# Altium PCB SPINNER_TWIN_STARS.PcbDoc (part 2 of 3)
Units mm, origin at the board's own origin, x right, y up, seen from the top; angles counter-clockwise.
Board outline 105 x 72 mm, 4 copper layers (Top_Elec, Mid Top Layer, Mid Bottom Layer, Bottom_GND), stack 0.742 mm thick; 199 components, 124 nets, 594 pads, 799 vias.
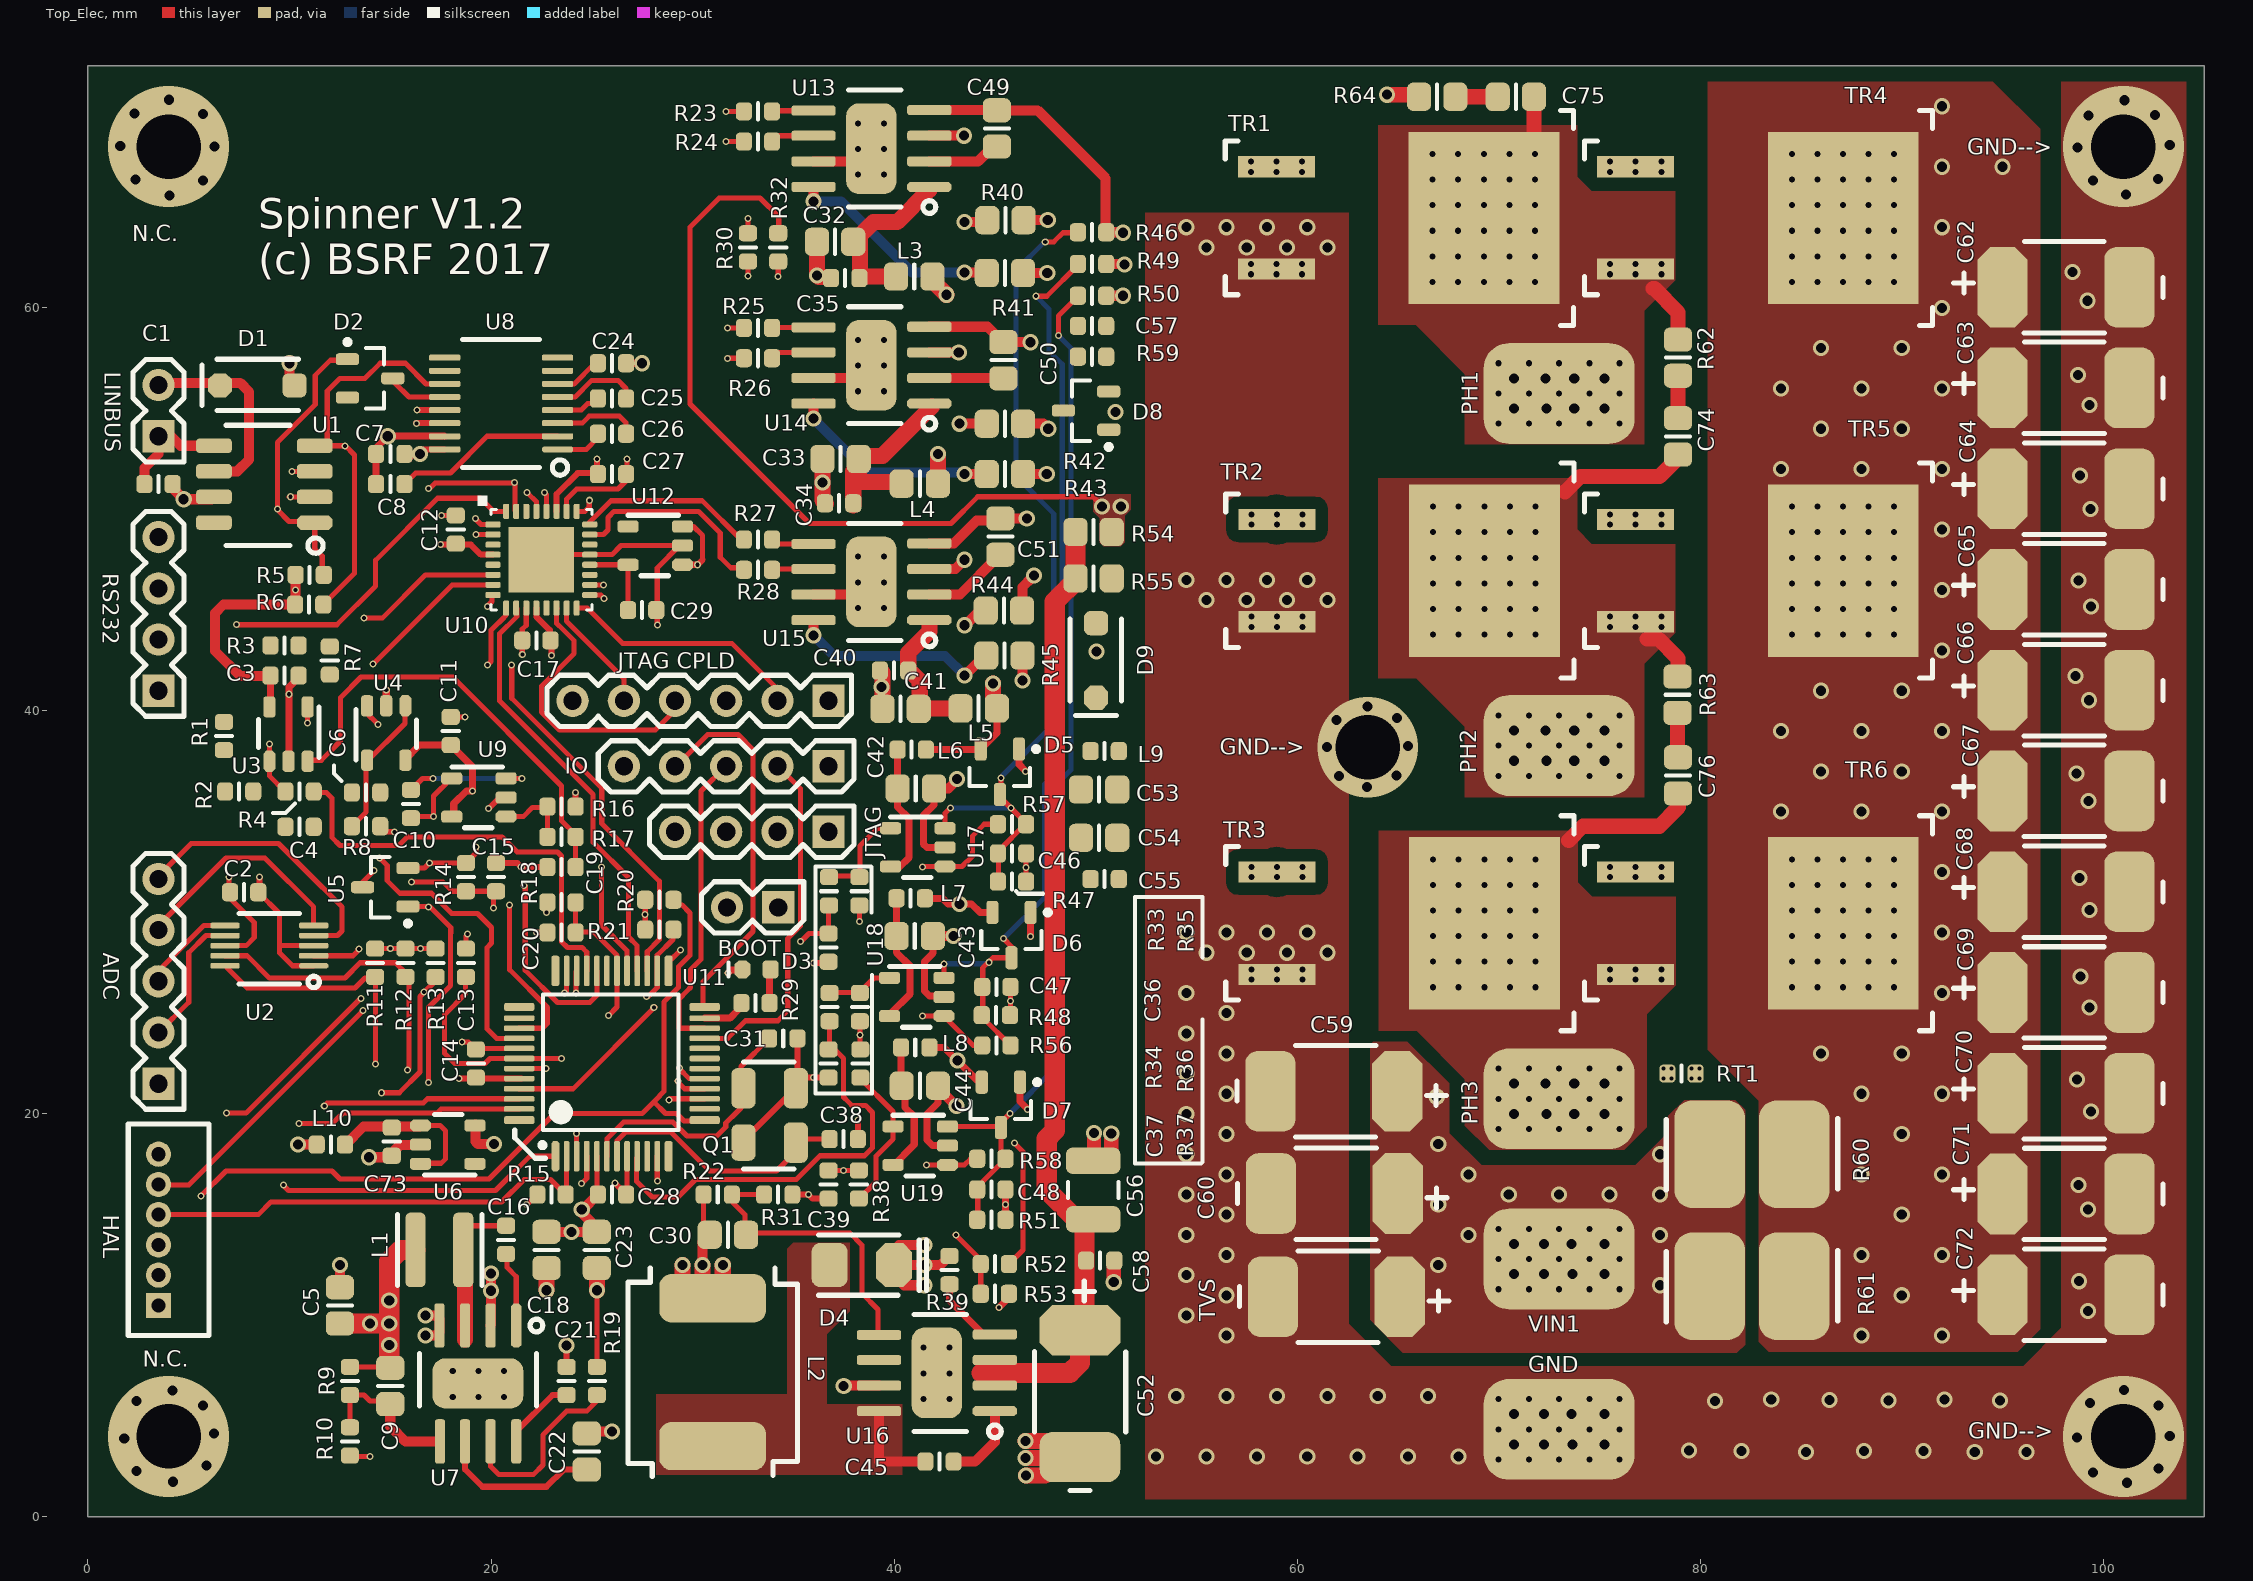
[diagram p0: Top_Elec view]

## Via types
v1: diameter 0.3, hole 0.3, Top_Elec to Bottom_GND, 352 vias
v2: diameter 0.8, hole 0.5, Top_Elec to Bottom_GND, 262 vias
v3: diameter 0.35, hole 0.2, Top_Elec to Bottom_GND, 140 vias
v4: diameter 0.5, hole 0.5, Top_Elec to Bottom_GND, 40 vias
v5: diameter 6/6/6/6 (per signal layer), hole 3.2, Top_Elec to Bottom_GND, 4 vias
v6: diameter 5/5/5/5 (per signal layer), hole 3.2, Top_Elec to Bottom_GND, 1 vias

## Nets (pads, with @x,y where several pads share a name; then routed paths per layer and width w, separated by ;. In a path a pad name is that pad's centre, name@x,y a point inside that pad or via, vN(x,y) a via of type N, cw(c..) or ccw(c..) an arc to the next point about the centre after c; other vN are vias at no path point) (continued)
134: R34.1 R36.1 U18.4 | length 3.3
  Top_Elec w0.254: R34.1@36.8,26.025 38.275,26.025 39,26.75 U18.4@39.775,26.75
135: C47.1 D6.3 R48.1 R49.2 R56.1 U18.3 | length 46.4
  Top_Elec w0.254: U18.3@42.475,26.75 v3(42.475,27.45) v3@42.475,27.475 ; v3(45.425,28.7) 45.825,28.3 D6.3@45.825,27.75 44.9,27.75 44.4,27.25 44.4,24.775 R56.1@45.775,23.4 ; v3(47.05,60.575) 47.575,60.575 R49.2@49.125,62.125
  Bottom_GND w0.254: v3(42.475,27.45) v3@44.625,27.45 ; v3(45.425,28.7) 47.475,30.75 47.475,36.375 48.347,37.247 48.347,57.2 47.678,57.869 47.678,59.947 v3(47.05,60.575)
  other v3: 44.7,27.525
140: R37.1 R38.1 U19.4 | length 7.3
  Top_Elec w0.254: R38.1@38.275,15.8 39.1,16.625 39.1,17.898 39.95,18.748 U19.4@39.95,19.375 39.95,20.125 R37.1@38.325,21.75
141: C48.1 D7.3 R50.2 R51.1 R58.1 U19.3 | length 50.8
  Top_Elec w0.254: U19.3@42.65,19.375 45.25,19.375 D7.3@45.275,19.35 ; R51.1@44.125,14.75 44.15,14.775 44.15,16.4 R58.1@45.525,17.775 ; D7.3@45.3,19.325 45.3,17.95 R58.1@45.45,17.8 ; D7.3@45.3,19.625 45.35,19.625 v3(45.75,20.025) ; v3(48.15,58.625) 48.15,59.6 48.85,60.3 R50.2@48.85,60.575
  Bottom_GND w0.254: v3@45.738,20.012 v3(45.75,20.025) 47.95,22.225 47.95,36.25 48.771,37.071 48.771,58.004 v3(48.15,58.625)
173: R23.2 U13.5 | length 1.9
  Top_Elec w0.254: R23.2@34.1,69.8 34.119,69.781 U13.5@36,69.781
174: R24.2 U13.6 | length 2.1
  Top_Elec w0.254: R24.2@34,68.3 34.24,68.54 U13.6@36,68.54
179: R25.2 U14.5 | length 2.1
  Top_Elec w0.254: R25.2@33.931,59.031 U14.5@36,59.031
180: R26.2 U14.6 | length 2.2
  Top_Elec w0.254: R26.2@33.9,57.5 34.19,57.79 U14.6@36,57.79
183: R27.2 U15.5 | length 2.1
  Top_Elec w0.254: R27.2@34,48.5 34.219,48.281 U15.5@36,48.281
184: R28.2 U15.6 | length 1.9
  Top_Elec w0.254: R28.2@34.1,47 34.14,47.04 U15.6@36,47.04
201: C31.2 Q1.1 U11.6 | length 13
  Top_Elec w0.254: U11.6@25.75,17.9 25.75,18.769 26.581,19.6 29.021,19.6 29.718,18.903 31.203,18.903 31.647,19.347 31.647,19.547 32.2,20.1 32.4,20.3 32.4,22.35 C31.2@33.8,23.75 ; Q1.1@32.4,21.15 Q1.1@32.5,21.25
202: C38.2 Q1.3 U11.7 | length 13.1
  Top_Elec w0.254: U11.7@26.25,18.05 26.25,18.669 26.681,19.1 28.921,19.1 30.85,17.171 34.171,17.171 35.1,18.1 35.1,18.55 35.3,18.75 C38.2@36.8,18.75